# EAGLE board Panelized-CC2-32K-EPROM-CARTRIDGE-2012-V2R0 (EAGLE 5.10)
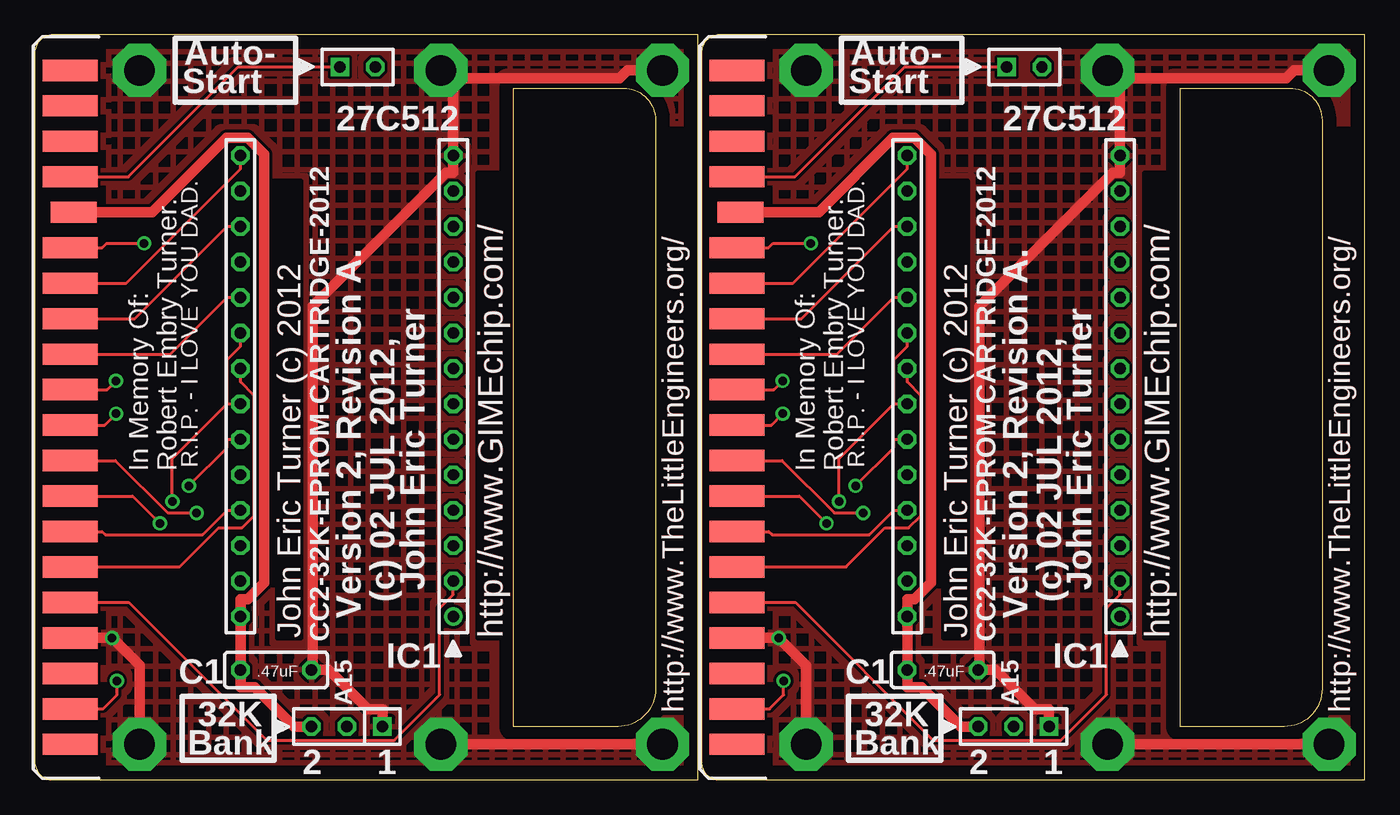
[diagram p0: board, top side]
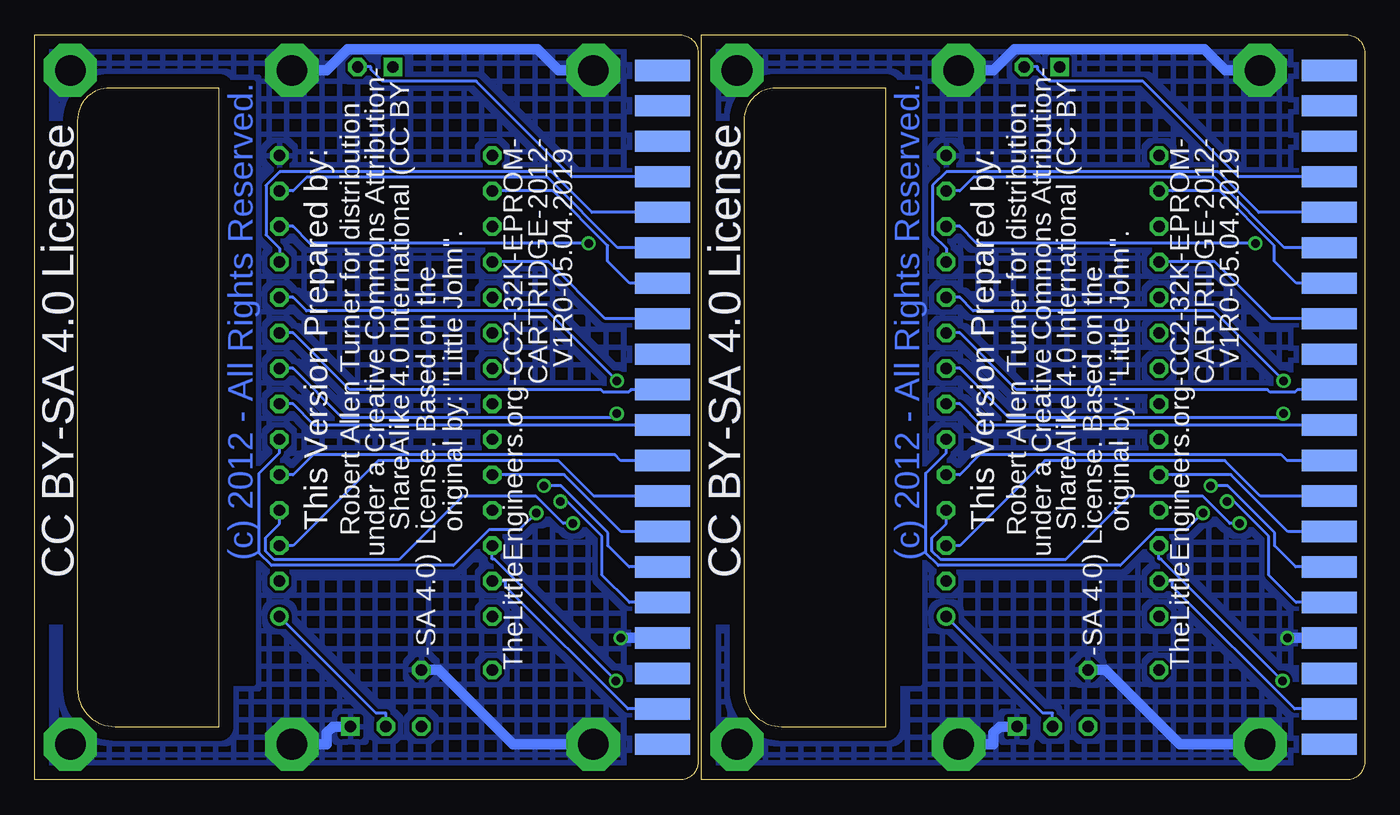
[diagram p1: board, bottom side, seen from below]

Size 95.25 x 53.34 mm. Coordinates in mm from the lower left corner, seen from the top.
Outline: 47.5,0 47.5,53.34 1.27,53.34 arc90 0,52.07 0,1.27 arc90 1.27,0 47.5,0
Outline: 34.29,49.53 42.16,49.53 arc-90 44.45,47.24 44.45,6.5 arc-90 41.76,3.81 34.29,3.81 34.29,49.53
Outline: 95.25,0 95.25,53.34 49.02,53.34 arc90 47.75,52.07 47.75,1.27 arc90 49.02,0 95.25,0
Outline: 82.04,49.53 89.91,49.53 arc-90 92.2,47.24 92.2,6.5 arc-90 89.51,3.81 82.04,3.81 82.04,49.53
Copper layers (1*16): Top 0.035mm / dielectric 1.5mm / Bottom 0.035mm
Design rules "default": minimum track width 10mil, minimum drill 24mil, track to track 8mil, track to pad 8mil, pad to pad 8mil, via to via 8mil, smd to smd 8mil, copper to edge 40mil, drill to drill 8mil, minimum pad ring 10mil, minimum via ring 8mil, stop-mask expansion 4mil, vias tented up to drill 0mil, thermal gap 10mil
Net classes: 0 default: width 0.203 mm, clearance 0.203 mm; 1 power: width 0.762 mm, clearance 0.203 mm
vRestrict: area 15.2,8.9 to 29.2,49.5; area 63,8.9 to 77,49.5

## Footprints (pad centres in the part's own frame; a part is rotated, then mirrored left to right if it is on the bottom)
C050-025X075 = drill 0.813 octagon: 1 -2.54,0; 2 2.54,0
SIL1X02-100 = drill 0.813 square: 1 -1.27,0 | drill 0.813 octagon: 2 1.27,0
SIL1X03-100 = drill 0.813 square: 1 -2.54,0 | drill 0.813 octagon: 2 0,0; 3 2.54,0
EDGE-CARD-PLUG-2X20-100-SHORT = smd 3.937 x 1.524: 1 3.81,24.13; 3 3.81,21.59; 5 3.81,19.05; 7 3.81,16.51; 11 3.81,11.43; 13 3.81,8.89; 15 3.81,6.35; 17 3.81,3.81; 19 3.81,1.27; 21 3.81,-1.27; 23 3.81,-3.81; 25 3.81,-6.35; 27 3.81,-8.89; 29 3.81,-11.43; 31 3.81,-13.97; 33 3.81,-16.51; 35 3.81,-19.05; 37 3.81,-21.59; 39 3.81,-24.13 | smd 3.937 x 1.524 bottom: 2 3.81,24.13; 4 3.81,21.59; 6 3.81,19.05; 8 3.81,16.51; 10 3.81,13.97; 12 3.81,11.43; 14 3.81,8.89; 16 3.81,6.35; 18 3.81,3.81; 20 3.81,1.27; 22 3.81,-1.27; 24 3.81,-3.81; 26 3.81,-6.35; 28 3.81,-8.89; 30 3.81,-11.43; 32 3.81,-13.97; 34 3.81,-16.51; 36 3.81,-19.05; 38 3.81,-21.59; 40 3.81,-24.13 | smd 3.302 x 1.524: 9 4.064,13.97
STAND-OFF = drill 2.2 pad 3.81 octagon: GND 0,0
DIL28-6-MINIMAL-OUTLINE = drill 0.813 round: 1 -16.51,-7.62 | drill 0.813 octagon: 2 -13.97,-7.62; 3 -11.43,-7.62; 4 -8.89,-7.62; 5 -6.35,-7.62; 6 -3.81,-7.62; 7 -1.27,-7.62; 8 1.27,-7.62; 9 3.81,-7.62; 10 6.35,-7.62; 11 8.89,-7.62; 12 11.43,-7.62; 13 13.97,-7.62; 14 16.51,-7.62; 15 16.51,7.62; 16 13.97,7.62; 17 11.43,7.62; 18 8.89,7.62; 19 6.35,7.62; 20 3.81,7.62; 21 1.27,7.62; 22 -1.27,7.62; 23 -3.81,7.62; 24 -6.35,7.62; 25 -8.89,7.62; 26 -11.43,7.62; 27 -13.97,7.62; 28 -16.51,7.62

## Placement (x,y rotation side)
C1  .47uF  [C050-025X075]  17.27,7.87 0 top
C2  .47uF  [C050-025X075]  65.02,7.87 0 top
CN1  1X02-SIP-100-32  [SIL1X02-100]  70.87,51.05 0 top
CN2  1X02-SIP-100-32  [SIL1X02-100]  23.11,51.05 0 top
CN3  1X03-SIP-100-32  [SIL1X03-100]  22.35,3.81 180 top
CN4  [EDGE-CARD-PLUG-2X20-100-SHORT]  -1.27,26.67 0 top
CN5  1X03-SIP-100-32  [SIL1X03-100]  70.1,3.81 180 top
CN6  [EDGE-CARD-PLUG-2X20-100-SHORT]  46.48,26.67 0 top
GND1  GROUNDING-STAND-OFF  [STAND-OFF]  44.96,50.8 0 top
GND2  GROUNDING-STAND-OFF  [STAND-OFF]  44.96,2.54 0 top
GND3  GROUNDING-STAND-OFF  [STAND-OFF]  29.08,50.8 0 top
GND4  GROUNDING-STAND-OFF  [STAND-OFF]  7.49,50.8 0 top
GND5  GROUNDING-STAND-OFF  [STAND-OFF]  29.08,2.54 0 top
GND6  GROUNDING-STAND-OFF  [STAND-OFF]  7.49,2.54 0 top
GND7  GROUNDING-STAND-OFF  [STAND-OFF]  92.71,50.8 0 top
GND8  GROUNDING-STAND-OFF  [STAND-OFF]  92.71,2.54 0 top
GND9  GROUNDING-STAND-OFF  [STAND-OFF]  76.83,50.8 0 top
GND10  GROUNDING-STAND-OFF  [STAND-OFF]  55.24,50.8 0 top
GND11  GROUNDING-STAND-OFF  [STAND-OFF]  76.83,2.54 0 top
GND12  GROUNDING-STAND-OFF  [STAND-OFF]  55.24,2.54 0 top
IC1  [DIL28-6-MINIMAL-OUTLINE]  22.35,28.19 90 top
IC2  [DIL28-6-MINIMAL-OUTLINE]  70.1,28.19 90 top

## Library data of the parts
C1 C2 = GIMEchip-Capacitor
CN1-CN3 CN5 = GIMEchip-Header-Generic
CN4 CN6 = GIMEchip-TRS-80-CoCo-3-Program-Pak-Cartridge
GND1-GND12 = GIMEchip-Grounding
IC1 IC2 = GIMEchip-EPROM

## Nets
GND [power]: C1.2 CN3.1 CN4.33 CN4.34 GND1.GND GND2.GND GND3.GND GND4.GND GND5.GND GND6.GND IC1.14
GND1 [power]: C2.2 CN5.1 CN6.33 CN6.34 GND7.GND GND8.GND GND9.GND GND10.GND GND11.GND GND12.GND IC2.14
N$1: CN1.1 CN6.7
N$2: CN2.1 CN4.7
N$3: CN2.2 CN4.8
N$4: CN4.19 IC1.10
N$5: CN4.20 IC1.9
N$6: CN4.21 IC1.8
N$7: CN4.22 IC1.7
N$8: CN4.23 IC1.6
N$9: CN4.24 IC1.5
N$10: CN4.25 IC1.4
N$11: CN4.26 IC1.3
N$12: CN4.27 IC1.25
N$13: CN4.28 IC1.24
N$14: CN4.29 IC1.21
N$15: CN4.30 IC1.23
N$16: CN4.31 IC1.2
N$17: CN4.37 IC1.26
N$18: CN4.38 IC1.27
N$19: CN3.2 IC1.1
N$20: CN1.2 CN6.8
N$21: CN4.10 IC1.11
N$22: CN4.11 IC1.12
N$23: CN4.12 IC1.13
N$24: CN4.13 IC1.15
N$25: CN4.14 IC1.16
N$26: CN4.15 IC1.17
N$27: CN4.16 IC1.18
N$28: CN4.17 IC1.19
N$29: CN4.32 IC1.20 IC1.22
N$30: CN6.19 IC2.10
N$31: CN6.20 IC2.9
N$32: CN6.21 IC2.8
N$33: CN6.22 IC2.7
N$34: CN6.23 IC2.6
N$35: CN6.24 IC2.5
N$36: CN6.25 IC2.4
N$37: CN6.26 IC2.3
N$38: CN6.27 IC2.25
N$39: CN6.28 IC2.24
N$40: CN6.29 IC2.21
N$41: CN6.30 IC2.23
N$42: CN6.31 IC2.2
N$43: CN6.37 IC2.26
N$44: CN6.38 IC2.27
N$45: CN5.2 IC2.1
N$46: CN6.10 IC2.11
N$47: CN6.11 IC2.12
N$48: CN6.12 IC2.13
N$49: CN6.13 IC2.15
N$50: CN6.14 IC2.16
N$51: CN6.15 IC2.17
N$52: CN6.16 IC2.18
N$53: CN6.17 IC2.19
N$54: CN6.32 IC2.20 IC2.22
VCC [power]: C1.1 CN3.3 CN4.9 IC1.28
VCC1 [power]: C2.1 CN5.3 CN6.9 IC2.28

## Tracks (layer width: path | path; a pad name or v marks a point on that pad's centre or on a via)
GND  (via drill 0.61 pad 1.02)
  Top 0.762: GND5.GND GND2.GND | 19.91,7.87 19.91,33.91 29.46,43.46 29.97,43.46 IC1.14 29.97,45.95 29.97,50.22 | 19.91,7.87 21.06,7.87 23.88,5.05 24.89,5.05 CN3.1 | C1.2 19.91,7.87 | 29.97,50.22 41.89,50.22 42.47,50.8 GND1.GND | GND3.GND 29.66,50.22 29.97,50.22 | CN4.34 5.09,10.16 v5.53,10.16 7.49,8.19 GND6.GND
  Bottom 0.762: GND3.GND 26.59,50.8 25.09,52.3 11.48,52.3 9.98,50.8 GND4.GND | v5.53,10.16 CN4.34 | GND5.GND 26.59,2.54 26.59,3.35 26.14,3.81 CN3.1 | C1.2 18.57,7.87 13.23,2.54 GND6.GND
  pour Top (hatched): -0.51,53.34 47.5,53.34 47.5,0 -0.51,0
  pour Bottom (hatched): -0.51,53.34 47.5,53.34 47.5,0 -0.51,0
GND1  (via drill 0.61 pad 1.02)
  Top 0.762: GND11.GND GND8.GND | 67.66,7.87 67.66,33.91 77.21,43.46 77.72,43.46 IC2.14 77.72,45.95 77.72,50.22 | 67.66,7.87 68.81,7.87 71.63,5.05 72.64,5.05 CN5.1 | C2.2 67.66,7.87 | 77.72,50.22 89.64,50.22 90.22,50.8 GND7.GND | GND9.GND 77.41,50.22 77.72,50.22 | CN6.34 52.84,10.16 v53.28,10.16 55.24,8.19 GND12.GND
  Bottom 0.762: GND9.GND 74.35,50.8 72.85,52.3 59.23,52.3 57.73,50.8 GND10.GND | v53.28,10.16 CN6.34 | GND11.GND 74.35,2.54 74.35,3.35 73.89,3.81 CN5.1 | C2.2 66.32,7.87 60.98,2.54 GND12.GND
  pour Top (hatched): 47.24,53.34 95.25,53.34 95.25,0 47.24,0
  pour Bottom (hatched): 47.24,53.34 95.25,53.34 95.25,0 47.24,0
N$1
  Top 0.203: CN6.7 54.44,43.18 62.32,51.05 CN1.1
N$2
  Top 0.203: CN4.7 6.69,43.18 14.56,51.05 CN2.1
N$3
  Bottom 0.203: CN4.8 9.04,43.18 15.89,50.03 22.59,50.03 23.42,50.85 23.42,51.05 CN2.2
N$4  (via drill 0.61 pad 1.02)
  Top 0.203: CN4.19 5.17,27.94 v5.81,28.57
  Bottom 0.203: v5.81,28.57 10.81,33.58 28.04,33.58 29.01,34.54 IC1.10
N$5
  Bottom 0.203: CN4.20 4.81,27.94 4.99,27.76 6.78,27.76 6.96,27.94 24.94,27.94 29.01,32 IC1.9
N$6  (via drill 0.61 pad 1.02)
  Top 0.203: CN4.21 4.99,25.4 v5.81,26.22
  Bottom 0.203: IC1.8 29.01,29.46 25.48,25.94 6.1,25.94 v5.81,26.22
N$7
  Bottom 0.203: IC1.7 29.01,26.92 27.48,25.4 CN4.22
N$8  (via drill 0.61 pad 1.02)
  Top 0.203: v11.58,19.11 9.52,19.11 5.77,22.86 CN4.23
  Bottom 0.203: IC1.6 29.97,23.42 31.43,21.96 31.43,16.23 30.55,15.35 17.51,15.35 14.97,17.89 12.8,17.89 v11.58,19.11
N$9
  Bottom 0.203: IC1.5 29.01,21.84 27.58,23.27 5.95,23.27 5.54,22.86 CN4.24
N$10  (via drill 0.61 pad 1.02)
  Top 0.203: CN4.25 7,20.32 v8.96,18.36
  Bottom 0.203: IC1.4 29.97,18.34 30.98,17.33 30.98,16.38 30.36,15.76 21.42,15.76 16.87,20.31 11.6,20.31 9.66,18.36 v8.96,18.36
N$11
  Bottom 0.203: CN4.26 7.46,20.32 10,22.86 22.91,22.86 29.01,16.76 IC1.3
N$12
  Top 0.203: IC1.25 13.77,19.3 12.02,17.55 5.04,17.55 4.81,17.78 CN4.27
N$13
  Bottom 0.203: CN4.28 5.5,17.78 9.58,21.86 13.75,21.86 13.77,21.84 IC1.24
N$14
  Top 0.203: CN4.29 10.36,15.24 13.15,18.03 14.83,18.03 15.71,18.92 15.71,27.52 14.73,28.5 IC1.21
N$15  (via drill 0.61 pad 1.02)
  Top 0.203: IC1.23 13.77,24.38 13.77,23.79 v11.03,21.05
  Bottom 0.203: v11.03,21.05 9.82,21.05 6.45,17.68 6.45,16.75 4.93,15.24 CN4.30
N$16
  Top 0.203: IC1.2 29.97,13.26 29.01,12.29 29.01,6.1 25.74,2.83 16.59,2.83 6.72,12.7 CN4.31
N$17  (via drill 0.61 pad 1.02)
  Top 0.203: v5.88,7.09 5.88,6.08 4.88,5.08 CN4.37
  Bottom 0.203: IC1.26 14.73,15.8 14.59,15.8 v5.88,7.09
N$18
  Bottom 0.203: CN4.38 5.02,5.08 13.77,13.83 13.77,14.22 IC1.27
N$19
  Bottom 0.203: CN3.2 22.35,4.78 23.06,4.78 IC1.1
N$20
  Bottom 0.203: CN6.8 56.79,43.18 63.64,50.03 70.34,50.03 71.17,50.85 71.17,51.05 CN1.2
N$21
  Bottom 0.203: IC1.11 29.97,38.05 30.94,39.02 30.94,42.56 29.96,43.54 10.5,43.54 7.6,40.64 CN4.10
N$22  (via drill 0.61 pad 1.02)
  Top 0.203: v7.83,38.42 5.13,38.42 4.81,38.1 CN4.11
  Bottom 0.203: IC1.12 29.01,39.62 27.8,38.42 v7.83,38.42
N$23
  Bottom 0.203: CN4.12 5.75,38.1 10.78,43.13 28.04,43.13 29.01,42.16 IC1.13
N$24
  Top 0.203: IC1.15 14.73,43.74 6.55,35.56 CN4.13
N$25
  Bottom 0.203: 13.77,42.16 IC1.16 | CN4.14 4.89,35.56 6.47,37.14 6.47,38.25 10.39,42.16 13.77,42.16 | 13.77,42.16
N$26
  Top 0.203: IC1.17 13.77,39.62 7.16,33.02 CN4.15
N$27
  Bottom 0.203: IC1.18 10.72,37.08 6.65,33.02 CN4.16
N$28
  Top 0.203: IC1.19 13.77,34.54 9.7,30.48 CN4.17
N$29  (via drill 0.61 pad 1.02)
  Top 0.203: 13.77,26.92 13.77,30.07 14.73,31.04 IC1.20 | v9.85,19.93 9.85,23 13.77,26.92 | 13.77,26.92 IC1.22
  Bottom 0.203: v9.85,19.93 9.37,19.93 6.88,17.43 6.88,14.66 4.92,12.7 CN4.32
N$30  (via drill 0.61 pad 1.02)
  Top 0.203: CN6.19 52.93,27.94 v53.56,28.57
  Bottom 0.203: v53.56,28.57 58.56,33.58 75.79,33.58 76.76,34.54 IC2.10
N$31
  Bottom 0.203: CN6.20 52.56,27.94 52.75,27.76 54.53,27.76 54.71,27.94 72.69,27.94 76.76,32 IC2.9
N$32  (via drill 0.61 pad 1.02)
  Top 0.203: CN6.21 52.75,25.4 v53.57,26.22
  Bottom 0.203: IC2.8 76.76,29.46 73.23,25.94 53.85,25.94 v53.57,26.22
N$33
  Bottom 0.203: IC2.7 76.76,26.92 75.23,25.4 CN6.22
N$34  (via drill 0.61 pad 1.02)
  Top 0.203: v59.33,19.11 57.27,19.11 53.52,22.86 CN6.23
  Bottom 0.203: IC2.6 77.72,23.42 79.18,21.96 79.18,16.23 78.3,15.35 65.26,15.35 62.72,17.89 60.55,17.89 v59.33,19.11
N$35
  Bottom 0.203: IC2.5 76.76,21.84 75.33,23.27 53.7,23.27 53.29,22.86 CN6.24
N$36  (via drill 0.61 pad 1.02)
  Top 0.203: CN6.25 54.75,20.32 v56.71,18.36
  Bottom 0.203: IC2.4 77.72,18.34 78.73,17.33 78.73,16.38 78.11,15.76 69.17,15.76 64.62,20.31 59.35,20.31 57.41,18.36 v56.71,18.36
N$37
  Bottom 0.203: CN6.26 55.21,20.32 57.75,22.86 70.66,22.86 76.76,16.76 IC2.3
N$38
  Top 0.203: IC2.25 61.52,19.3 59.77,17.55 52.79,17.55 52.56,17.78 CN6.27
N$39
  Bottom 0.203: CN6.28 53.25,17.78 57.33,21.86 61.5,21.86 61.52,21.84 IC2.24
N$40
  Top 0.203: CN6.29 58.11,15.24 60.91,18.03 62.58,18.03 63.47,18.92 63.47,27.52 62.48,28.5 IC2.21
N$41  (via drill 0.61 pad 1.02)
  Top 0.203: IC2.23 61.52,24.38 61.52,23.79 v58.78,21.05
  Bottom 0.203: v58.78,21.05 57.57,21.05 54.2,17.68 54.2,16.75 52.69,15.24 CN6.30
N$42
  Top 0.203: IC2.2 77.72,13.26 76.76,12.29 76.76,6.1 73.49,2.83 64.34,2.83 54.47,12.7 CN6.31
N$43  (via drill 0.61 pad 1.02)
  Top 0.203: v53.63,7.09 53.63,6.08 52.63,5.08 CN6.37
  Bottom 0.203: IC2.26 62.48,15.8 62.34,15.8 v53.63,7.09
N$44
  Bottom 0.203: CN6.38 52.77,5.08 61.52,13.83 61.52,14.22 IC2.27
N$45
  Bottom 0.203: CN5.2 70.1,4.78 70.81,4.78 IC2.1
N$46
  Bottom 0.203: IC2.11 77.72,38.05 78.69,39.02 78.69,42.56 77.72,43.54 58.25,43.54 55.35,40.64 CN6.10
N$47  (via drill 0.61 pad 1.02)
  Top 0.203: v55.58,38.42 52.88,38.42 52.56,38.1 CN6.11
  Bottom 0.203: IC2.12 76.76,39.62 75.55,38.42 v55.58,38.42
N$48
  Bottom 0.203: CN6.12 53.5,38.1 58.53,43.13 75.79,43.13 76.76,42.16 IC2.13
N$49
  Top 0.203: IC2.15 62.48,43.74 54.3,35.56 CN6.13
N$50
  Bottom 0.203: 61.52,42.16 IC2.16 | CN6.14 52.64,35.56 54.23,37.14 54.23,38.25 58.14,42.16 61.52,42.16 | 61.52,42.16
N$51
  Top 0.203: IC2.17 61.52,39.62 54.91,33.02 CN6.15
N$52
  Bottom 0.203: IC2.18 58.47,37.08 54.4,33.02 CN6.16
N$53
  Top 0.203: IC2.19 61.52,34.54 57.45,30.48 CN6.17
N$54  (via drill 0.61 pad 1.02)
  Top 0.203: 61.52,26.92 61.52,30.07 62.48,31.04 IC2.20 | v57.6,19.93 57.6,23 61.52,26.92 | 61.52,26.92 IC2.22
  Bottom 0.203: v57.6,19.93 57.12,19.93 54.63,17.43 54.63,14.66 52.67,12.7 CN6.32
VCC
  Top 0.762: CN4.9 8.4,40.64 13.72,45.96 15.23,45.96 16.41,44.78 16.41,14.1 15.25,12.93 14.73,12.93 IC1.28 C1.1 14.73,6.63 15.75,6.63 18.57,3.81 CN3.3
VCC1
  Top 0.762: CN6.9 56.15,40.64 61.48,45.96 62.98,45.96 64.17,44.78 64.17,14.1 63,12.93 62.48,12.93 IC2.28 C2.1 62.48,6.63 63.5,6.63 66.32,3.81 CN5.3

## Text on the board
Top: John Eric Turner (c) 2012 | http://www.GIMEchip.com/ | John Eric Turner (c) 2012 | http://www.GIMEchip.com/ | http://www.TheLittleEngineers.org/ | http://www.TheLittleEngineers.org/
Bottom: (c) 2012 - All Rights Reserved. | (c) 2012 - All Rights Reserved. | CC BY-SA 4.0 License | CC BY-SA 4.0 License
tPlace: In Memory Of: | Robert Embry Turner. | R.I.P. - I LOVE YOU DAD. | In Memory Of: | Robert Embry Turner. | R.I.P. - I LOVE YOU DAD.
bPlace: under a Creative Commons Attribution- | under a Creative Commons Attribution- | ShareAlike 4.0 International (CC BY | ShareAlike 4.0 International (CC BY | Robert Allen Turner for distribution | Robert Allen Turner for distribution | CC BY-SA 4.0 License | CC BY-SA 4.0 License | CARTRIDGE-2012- | TheLittleEngineers.org-CC2-32K-EPROM- | CARTRIDGE-2012- | TheLittleEngineers.org-CC2-32K-EPROM- | V1R0-05.04.2019 | This Version Prepared by: | V1R0-05.04.2019 | This Version Prepared by: | original by: "Little John". | original by: "Little John". | -SA 4.0) License. Based on the | -SA 4.0) License. Based on the
tNames: Auto- | Auto- | Start | Start | 27C512 | 27C512 | GND3 | GND3 | C1 | C1 | GND4 | GND6 | GND4 | GND6 | CN2 | CN2 | CN3 | GND1 | GND2 | GND5 | CN3 | GND1 | GND2 | GND5 | IC1 | IC1 | CN4 | CN4 | John Eric Turner | John Eric Turner | (c) 02 JUL 2012, | (c) 02 JUL 2012, | Version 2, Revision A. | Version 2, Revision A. | John Eric Turner (c) 2012 | CC2-32K-EPROM-CARTRIDGE-2012 | http://www.GIMEchip.com/ | John Eric Turner (c) 2012 | CC2-32K-EPROM-CARTRIDGE-2012 | http://www.GIMEchip.com/ | IC1 | IC1 | C1 | C1 | A15 | http://www.TheLittleEngineers.org/ | A15 | http://www.TheLittleEngineers.org/ | 32K | 32K | Bank | Bank | 2 | 1 | 2 | 1